# EAGLE board audioamp_autoroute (EAGLE 6.4)
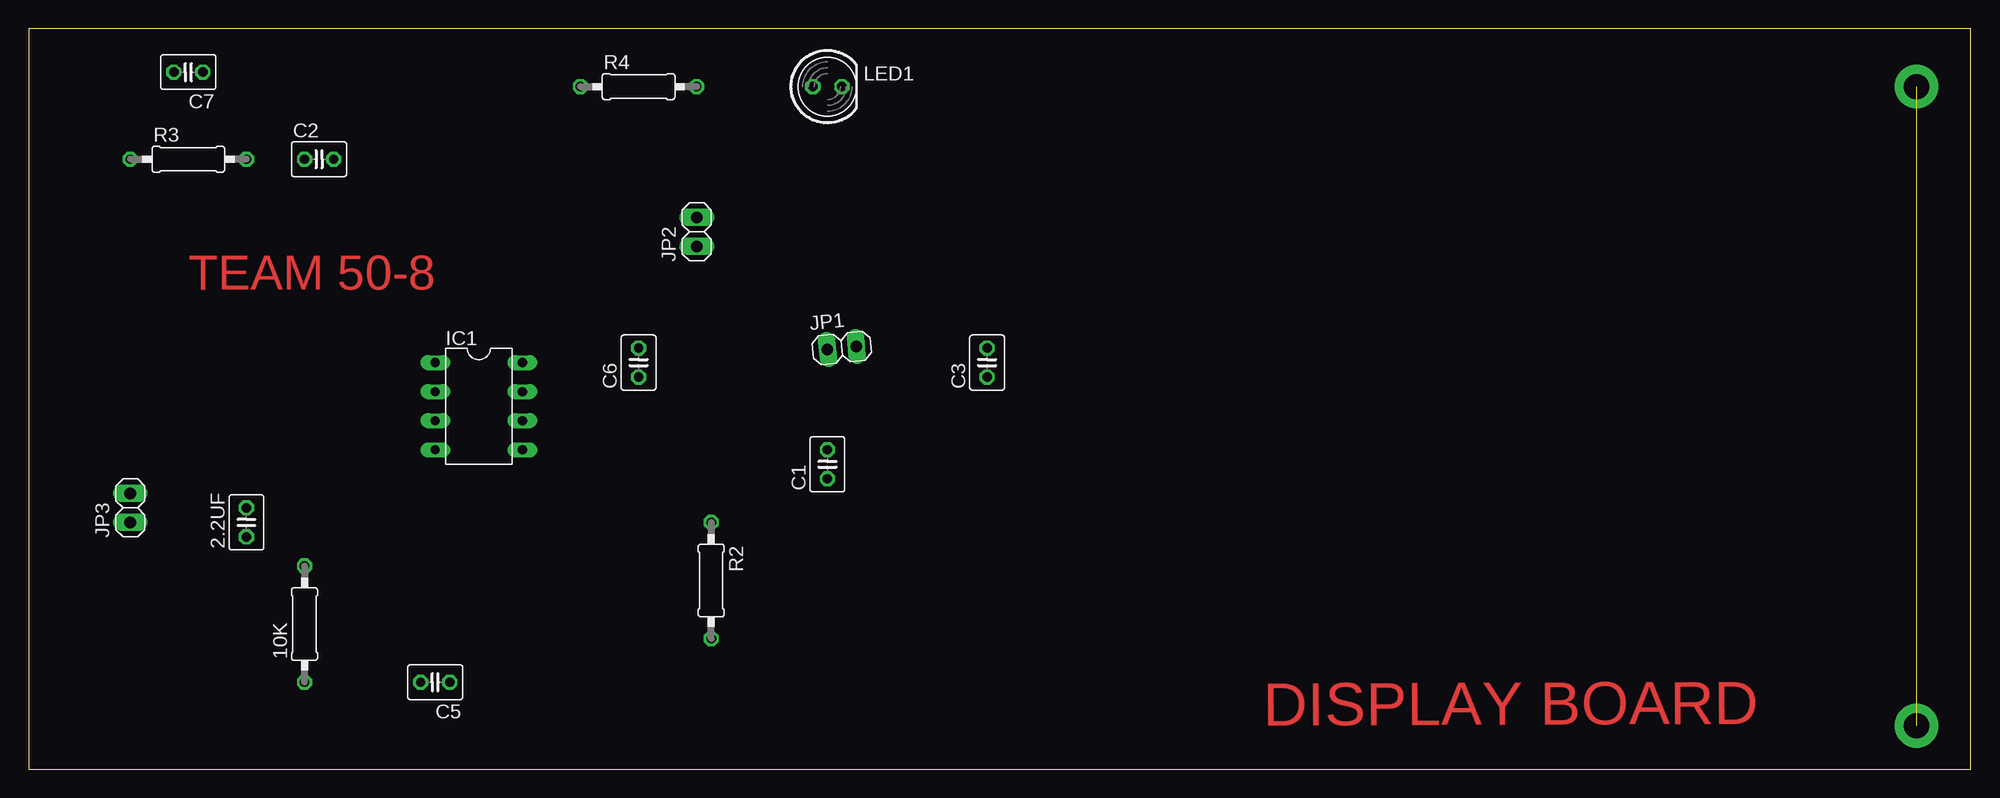
[diagram p0: board, top side]
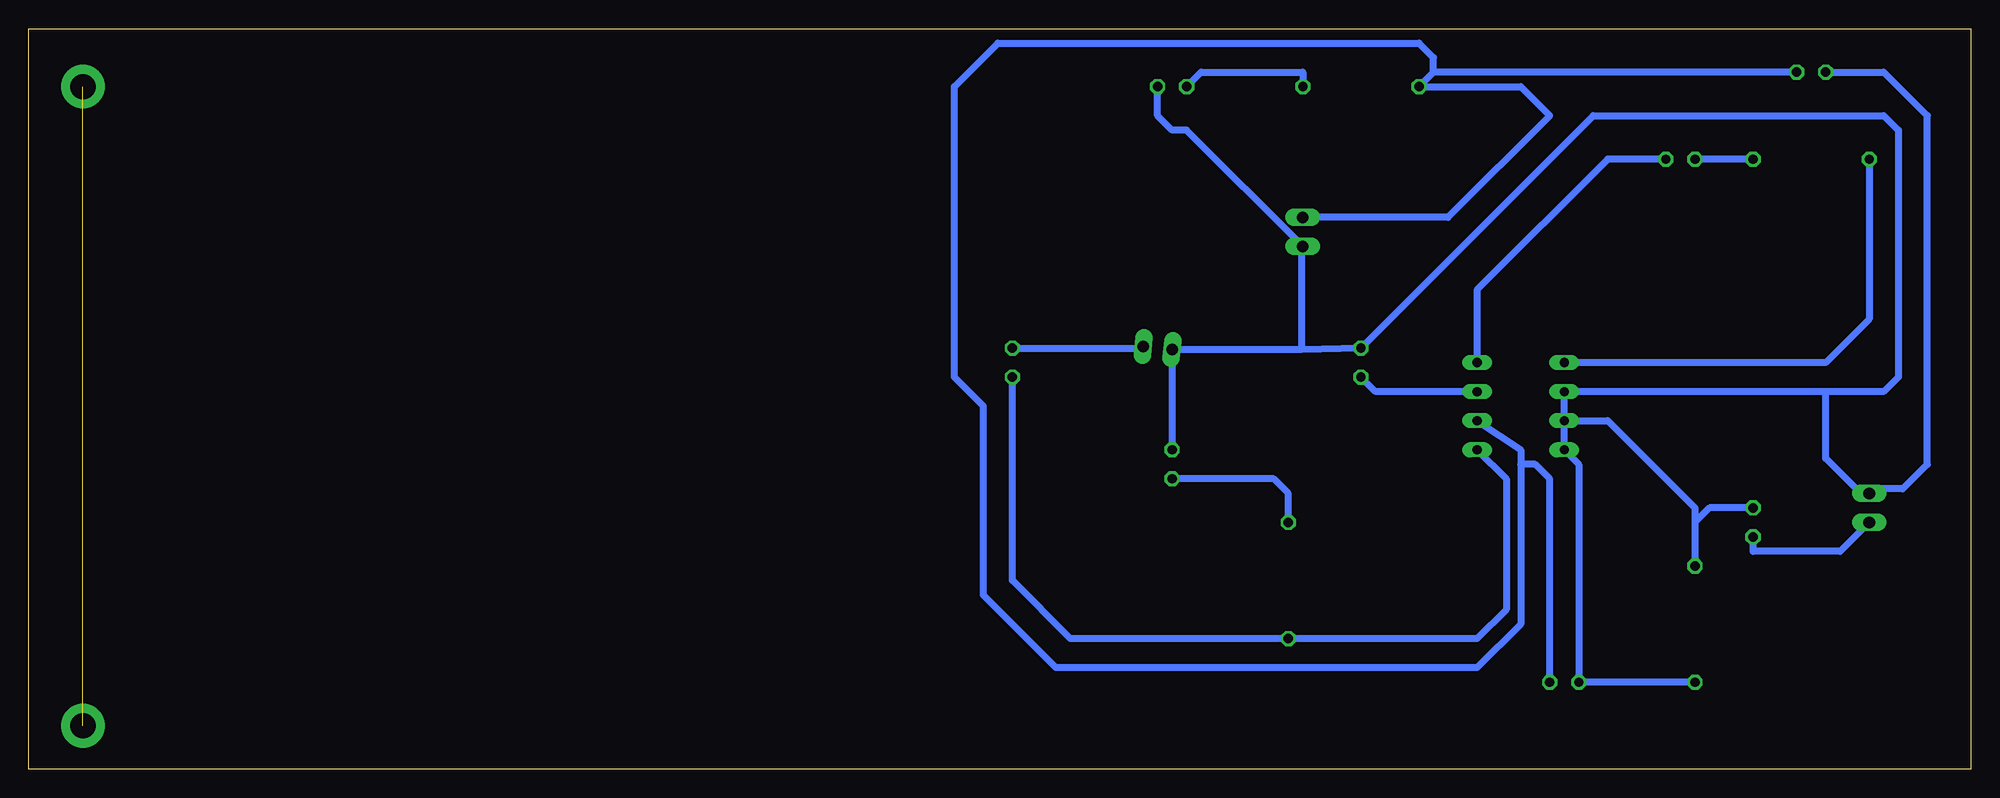
[diagram p1: board, bottom side, seen from below]

Size 169.85 x 64.76 mm. Coordinates in mm from the lower left corner, seen from the top.
Outline: 0,0 169.85,0 169.85,64.76 0,64.76 0,0
Copper layers (1*16): Top 0.035mm / dielectric 1.5mm / Bottom 0.035mm
Design rules "default": minimum track width 10mil, minimum drill 24mil, track to track 8mil, track to pad 8mil, pad to pad 8mil, via to via 8mil, smd to smd 8mil, copper to edge 40mil, drill to drill 8mil, minimum pad ring 10mil, minimum via ring 8mil, stop-mask expansion 4mil, vias tented up to drill 0mil, thermal gap 10mil

## Footprints (pad centres in the part's own frame; a part is rotated, then mirrored left to right if it is on the bottom)
C025-030X050 = drill 0.813 octagon: 1 -1.27,0; 2 1.27,0
0207/10 = drill 0.813 octagon: 1 -5.08,0; 2 5.08,0
DIL08 = drill 0.813 long: 1 -3.81,-3.81; 2 -1.27,-3.81; 3 1.27,-3.81; 4 3.81,-3.81; 5 3.81,3.81; 6 1.27,3.81; 7 -1.27,3.81; 8 -3.81,3.81
1X02 = drill 1.016 long: 1 -1.27,0; 2 1.27,0
LED5MM = drill 0.813 octagon: A -1.27,0; K 1.27,0

## Placement (x,y rotation side)
2.2UF  [C025-030X050]  19.05,21.59 90 top
10K  [0207/10]  24.13,12.7 90 top
C1  0.22uF  [C025-030X050]  69.85,26.67 90 top
C2  10uF  [C025-030X050]  25.4,53.34 0 top
C3  470uF  [C025-030X050]  83.82,35.56 90 top
C5  220uF  [C025-030X050]  35.56,7.62 180 top
C6  0.1uF  [C025-030X050]  53.34,35.56 90 top
C7  0.1uF  [C025-030X050]  13.97,60.96 180 top
IC1  [DIL08]  39.37,31.75 270 top
JP1  [1X02]  71.12,36.83 5.9 top
JP2  [1X02]  58.42,46.99 90 top
JP3  [1X02]  8.89,22.86 90 top
LED1  LED5MM  [LED5MM]  69.85,59.69 0 top
R2  22E  [0207/10]  59.69,16.51 270 top
R3  2k2  [0207/10]  13.97,53.34 0 top
R4  1K  [0207/10]  53.34,59.69 0 top

## Library data of the parts
2.2UF C1-C3 C5-C7 = rcl
10K R2-R4 = resistor
IC1 = ic-package
JP1-JP3 = pinhead
LED1 = CEDTv68

## Nets
AUDIOIN: 2.2UF.1 JP3.1
GND: 10K.1 C1.2 C5.2 C6.2 C7.2 IC1.2 IC1.4 JP1.1 JP2.1 JP3.2 LED1.K
N$1: C2.1 R3.2
N$2: IC1.1 R3.1
N$3: C2.2 IC1.8
N$5: C3.1 IC1.5 R2.2
N$6: C1.1 R2.1
N$7: C6.1 IC1.7
N$9: 2.2UF.2 10K.2 IC1.3
N$14: LED1.A R4.2
SPEAKEROUT: C3.2 JP1.2
SUPPLYIN: C5.1 C7.1 IC1.6 JP2.2 R4.1

## Tracks (layer width: path | path; a pad name or v marks a point on that pad's centre or on a via)
AUDIOIN
  Bottom 0.61: JP3.1 11.43,19.05 19.05,19.05 2.2UF.1
GND
  Bottom 0.406: JP3.2 10.03,24.51 | JP1.1 | JP2.1 58.55,45.59
  Bottom 0.61: 10K.1 C5.2 34.29,26.67 IC1.4 IC1.2 12.7,33.02 | JP1.1 C1.2 | 58.55,36.7 C6.2 33.02,57.15 7.62,57.15 6.35,55.88 6.35,34.29 7.62,33.02 12.7,33.02 | 58.55,36.7 JP1.1 | C7.2 7.62,60.96 3.81,57.15 3.81,26.67 5.97,24.51 10.03,24.51 12.7,27.18 12.7,33.02 | JP2.1 68.58,55.88 69.85,55.88 71.12,57.15 LED1.K | 58.55,45.59 58.55,36.7
N$1
  Bottom 0.61: R3.2 C2.1
N$2
  Bottom 0.61: R3.1 8.89,39.37 12.7,35.56 IC1.1
N$3
  Bottom 0.61: C2.2 31.75,53.34 43.18,41.91 IC1.8
N$5
  Bottom 0.61: C3.1 83.82,16.51 78.74,11.43 R2.2 43.18,11.43 40.64,13.97 40.64,25.4 IC1.5
N$6
  Bottom 0.61: R2.1 59.69,24.13 60.96,25.4 C1.1
N$7
  Bottom 0.61: IC1.7 52.07,33.02 C6.1
N$9
  Bottom 0.61: 2.2UF.2 22.86,22.86 24.13,21.59 | 24.13,21.59 10K.2 | IC1.3 31.75,30.48 24.13,22.86 24.13,21.59
N$14
  Bottom 0.61: LED1.A 67.31,60.96 58.42,60.96 R4.2
S$1  (via drill 2.2 pad 3.81)  (1 unrouted)
  other vias: 165.1,59.69 165.1,3.81
SPEAKEROUT
  Bottom 0.61: C3.2 72.51,36.83 JP1.2
SUPPLYIN
  Bottom 0.61: IC1.6 39.37,27.94 39.37,26.67 | 39.37,26.67 39.37,12.7 43.18,8.89 80.01,8.89 86.36,15.24 86.36,31.75 88.9,34.29 88.9,59.69 85.09,63.5 48.26,63.5 46.99,62.23 46.99,60.96 | C7.1 46.99,60.96 | 46.99,60.96 R4.1 39.37,59.69 36.83,57.15 45.72,48.26 JP2.2 | C5.1 36.83,25.4 38.1,26.67 39.37,26.67

## Text on the board
Top: TEAM 50-8 | DISPLAY BOARD